# EAGLE board FINAL DINO CIRCUIT (EAGLE 9.6.2)
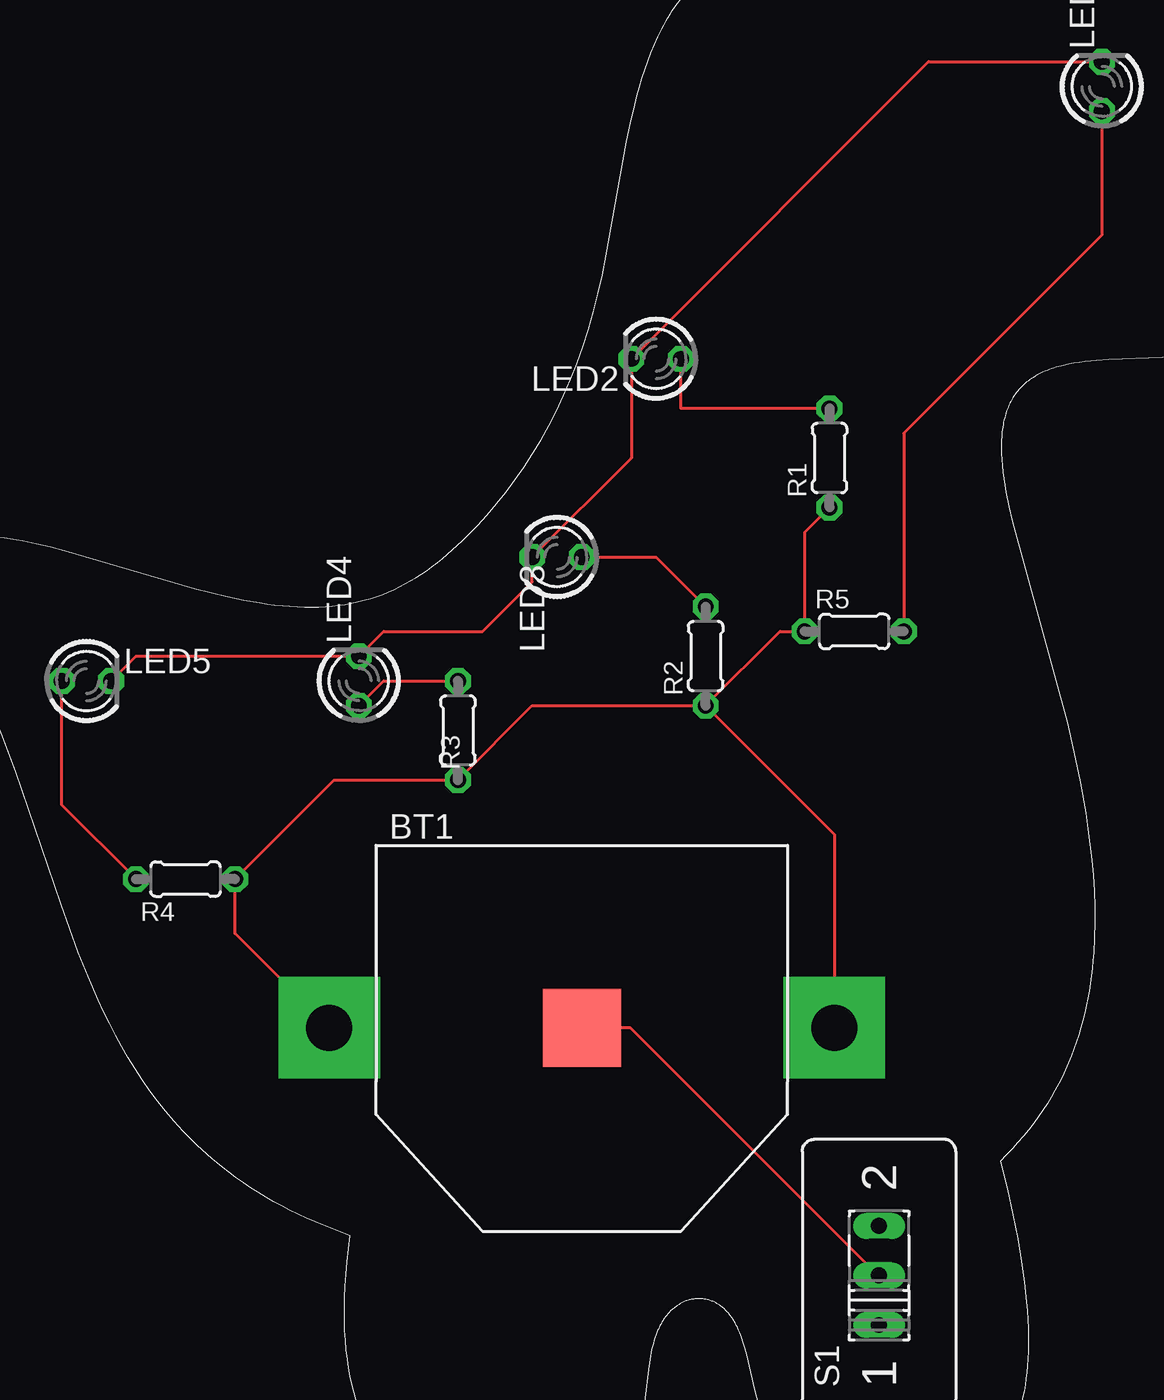
[diagram p0: board, top side]
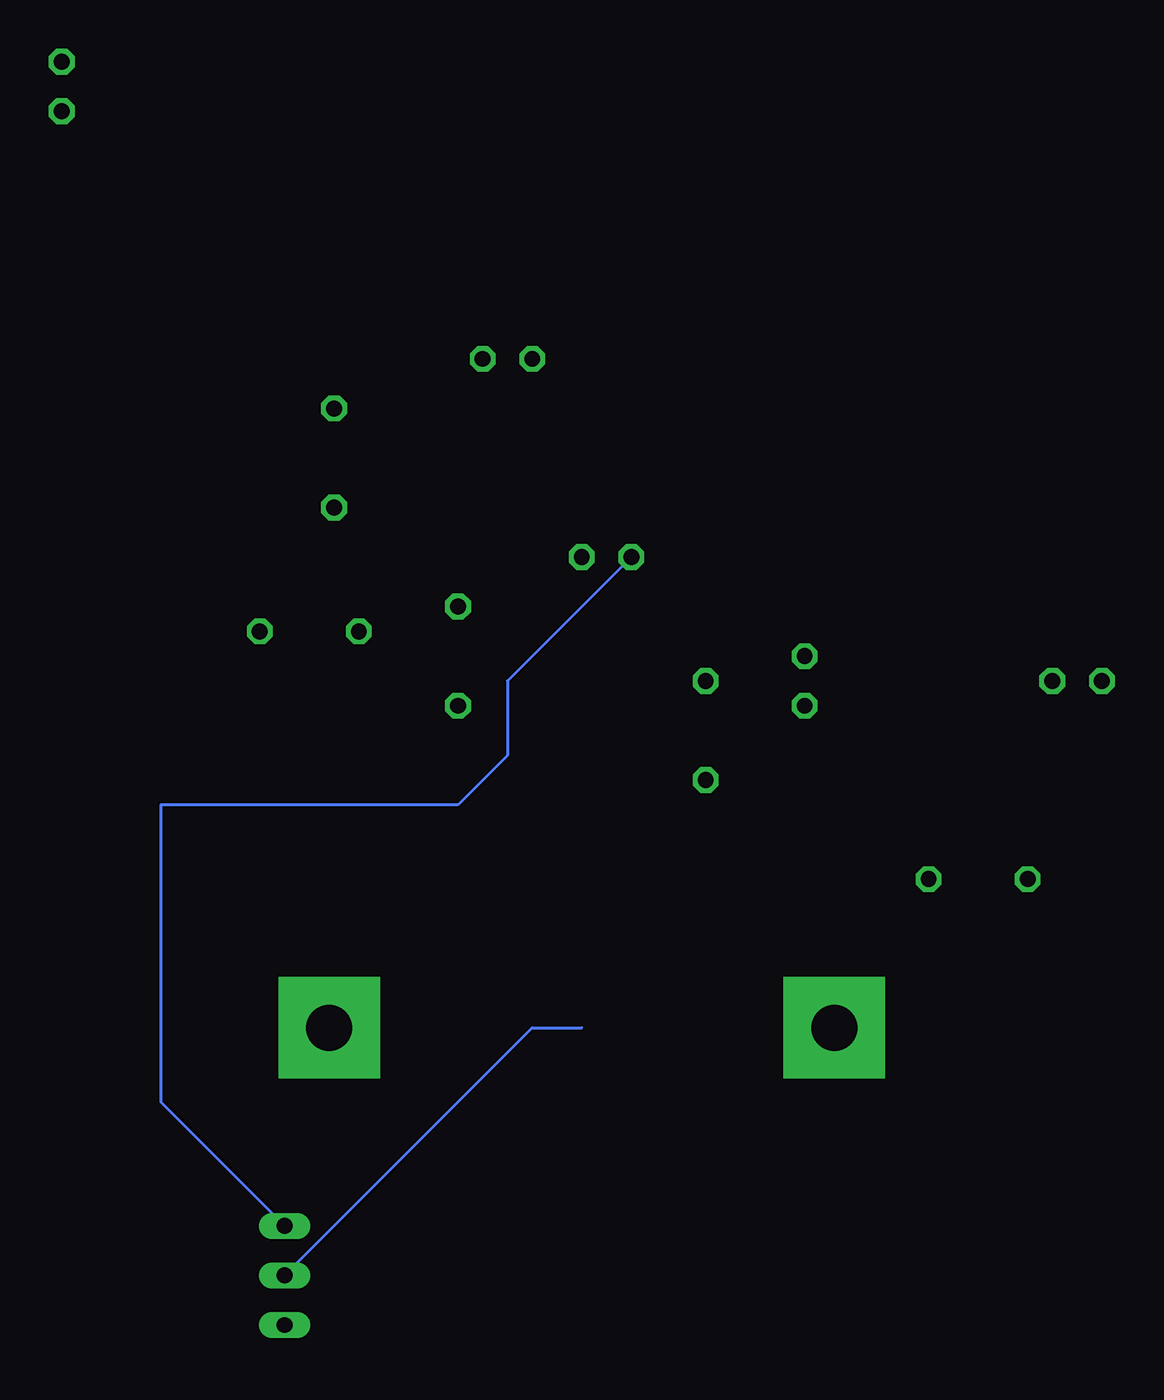
[diagram p1: board, bottom side, seen from below]

No outline drawn. Coordinates in mm, seen from the top.
Copper layers (1*16): Top 0.035mm / dielectric 1.5mm / Bottom 0.035mm
Design rules "default": minimum track width 6mil, minimum drill 0.35mm, track to track 6mil, track to pad 6mil, pad to pad 6mil, via to via 6mil, smd to smd 6mil, copper to edge 40mil, drill to drill 6mil, minimum pad ring 10mil, minimum via ring 8mil, stop-mask expansion 4mil, vias tented up to drill 0mil, thermal gap 10mil

## Footprints (pad centres in the part's own frame; a part is rotated, then mirrored left to right if it is on the bottom)
79523141 = smd 4 x 4: N 0,0 | drill 2.35 pad 5.2 square: P1 -12.95,0; P2 12.95,0
LED3MM = drill 0.813 octagon: A -1.27,0; K 1.27,0
0204/5 = drill 0.813 octagon: 1 -2.54,0; 2 2.54,0
M251 = drill 0.813 long: 1 -2.54,0; 2 0,0; 3 2.54,0

## Placement (x,y rotation side)
BT1  79523141  [79523141]  33.02,26.67 0 top
LED1  [LED3MM]  59.69,74.93 90 top
LED2  [LED3MM]  36.83,60.96 180 top
LED3  [LED3MM]  31.75,50.8 180 top
LED4  [LED3MM]  21.59,44.45 90 top
LED5  [LED3MM]  7.62,44.45 0 top
R1  [0204/5]  45.72,55.88 90 top
R2  [0204/5]  39.37,45.72 90 top
R3  [0204/5]  26.67,41.91 90 top
R4  [0204/5]  12.7,34.29 180 top
R5  [0204/5]  46.99,46.99 0 top
S1  [M251]  48.26,13.97 90 top

## Library data of the parts
BT1 = Battery Holder; CREATED_BY: PCBLayout.com; DIGIKEY_PART_NO: 732-12323-2-ND; MANUFACTURER: Wurth Electronics Inc.; MPN: 79523141
LED1-LED5 = led
R1-R5 = rcl; SPICEPREFIX: R
S1 = switch

## Nets
N$1: LED2.A R1.2
N$2: LED1.K LED2.K LED3.K LED4.K LED5.K S1.3
N$3: BT1.P1 BT1.P2 R1.1 R2.1 R3.1 R4.1 R5.1
N$4: LED3.A R2.2
N$5: LED4.A R3.2
N$6: LED5.A R4.2
N$7: LED1.A R5.2
N$8: BT1.N S1.2

## Tracks (layer width: path | path; a pad name or v marks a point on that pad's centre or on a via)
N$1
  Top 0.152: R1.2 38.1,58.42 LED2.A
N$2
  Top 0.152: LED1.K 50.8,76.2 LED2.K 35.56,55.88 LED3.K 30.48,49.53 27.94,46.99 22.86,46.99 LED4.K 10.16,45.72 LED5.K
  Bottom 0.152: LED3.K 36.83,44.45 36.83,40.64 39.37,38.1 54.61,38.1 54.61,22.86 S1.3
N$3
  Top 0.152: BT1.P1 15.24,31.5 R4.1 20.32,39.37 R3.1 30.48,43.18 R2.1 | R2.1 43.18,46.99 R5.1 44.45,52.07 R1.1 | R2.1 45.97,36.58 BT1.P2
N$4
  Top 0.152: LED3.A 36.83,50.8 R2.2
N$5
  Top 0.152: LED4.A 22.86,44.45 R3.2
N$6
  Top 0.152: R4.2 6.35,38.1 LED5.A
N$7
  Top 0.152: LED1.A 59.69,67.31 49.53,57.15 R5.2
N$8
  Top 0.152: BT1.N 35.51,26.67 48.16,14.02 S1.2
  Bottom 0.152: S1.2 35.56,26.67 BT1.N